# Altium PCB 风扇_V1.0.PcbDoc
Units mm, origin at the board's own origin, x right, y up, seen from the top; angles counter-clockwise.
Board outline 100 x 20 mm, 2 copper layers (Top Layer, Bottom Layer); 65 components, 44 nets, 189 pads, 136 vias.
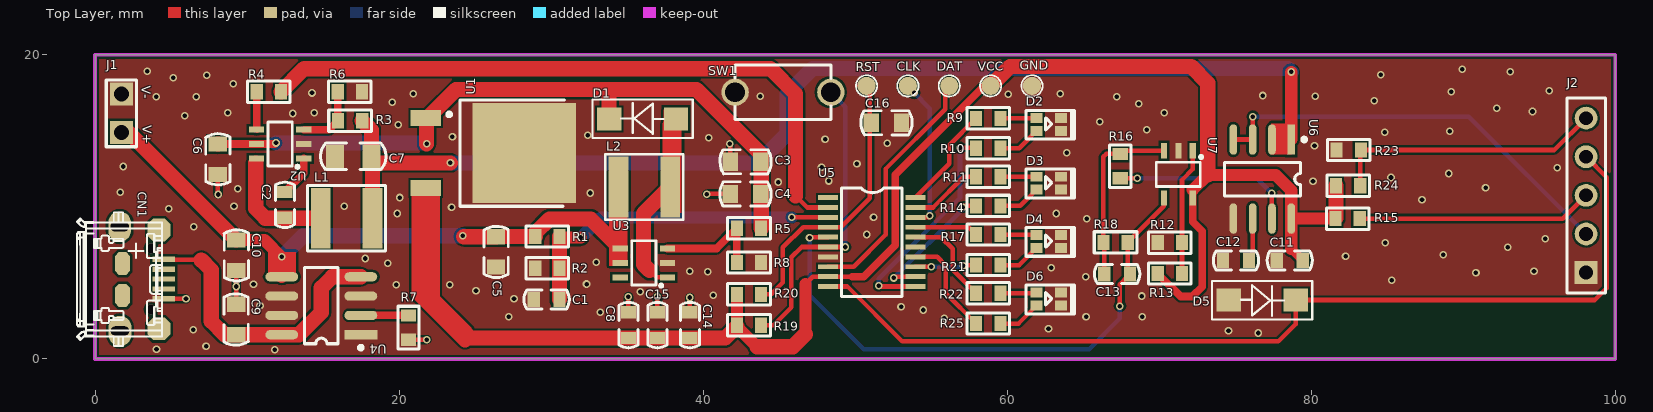
[diagram p0: Top Layer view]
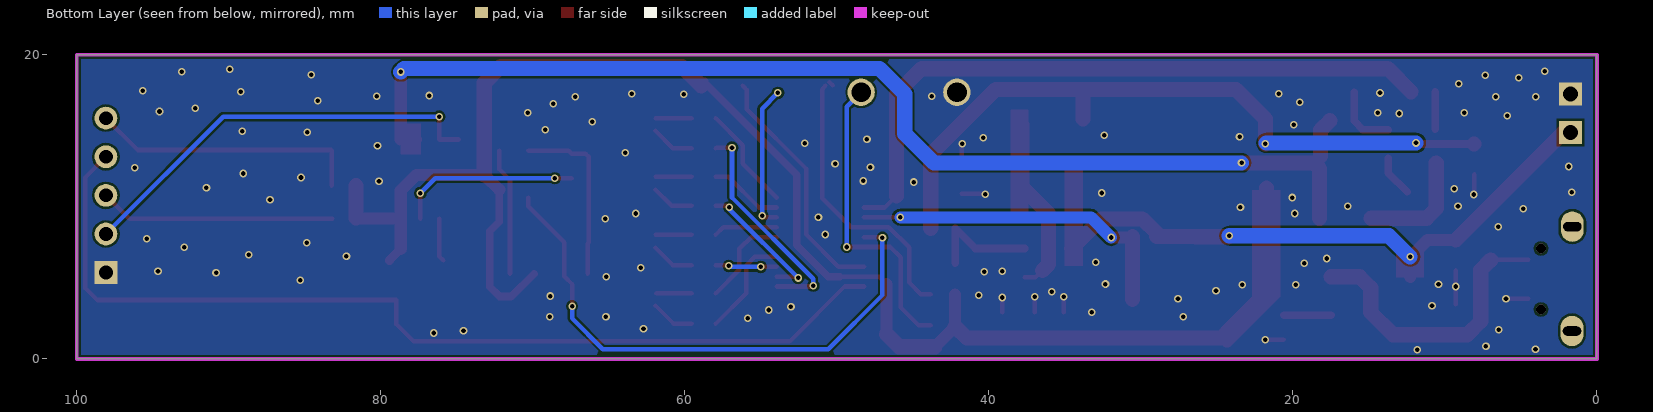
[diagram p1: Bottom Layer view, seen from below]

## Layer stack, top to bottom
Top Layer: signal copper 0.0356
Dielectric: dielectric 0.32, FR-4, Dk 4.8
Bottom Layer: signal copper 0.0356

## Board outline
0,0 100,0 100,20 0,20

## Design rules (kind name [scope] priority, off if disabled: settings)
Clearance [All] p1: gap=0.15
ComponentClearance [All] p1: gap=0.254 collisioncheckmode=3 verticalgap=0.254
PlaneConnect [All] p1: planeconnectstyle=Direct reliefexpansion=0.508 reliefentries=4 reliefconductorwidth=0.254 reliefairgap=0.254
PolygonConnect [All] p1: connectstyle=Direct reliefconductorwidth=0.254 reliefentries=4 polygonreliefangle="90 Angle"
RoutingVias [All] p1: holewidth=0.3 width=0.5 viastyle="Through Hole" minholewidth=0.3 minwidth=0.5 maxholewidth=0.711 maxwidth=1.27
SolderMaskExpansion [All] p1: expansion=0.102
TestPointUsage [All] p1: valid=0 allowmultiple=FALSE
Testpoint [(IsPad And (OnTopLayer Or OnBottomLayer))] p1: side=3 testpointundercomponent=TRUE minsize=1.016 maxsize=2.54 preferedsize=1.524 minholesize=0 maxholesize=1.016 preferedholesize=0.813 testpointgrid=0.025 style=297 order=0123456789
Width [All] p1: maxlimit=1 minlimit=0.15 preferedwidth=0.254
17 further rules are at their usual default settings.

## Components (designator, comment, footprint, x,y, rotation, side; value= is the part's Value field where it differs from the comment)
C1 "0.1UF" C-0603 29.707,3.9 r0 top
C2 "10nF" C-0603 12.482,10.13 r270 top
C3 "10uF" C-0805 42.789,12.959 r0 top
C4 "22uF" C-0805 42.789,10.846 r180 top
C5 "10uF" C-0805 26.375,7.033 r270 top
C6 "22uF" C-0805 8.077,13.128 r270 top
C7 "47uF" C-1206 16.985,13.315 r0 top
C8 "0.1uF" C-0603 35.085,2.217 r90 top
C9 "10uF" C-0805 9.282,2.584 r90 top
C10 "10uF" C-0805 9.289,6.811 r270 top
C11 "0.1uF" C-0603 78.59,6.477 r180 top
C12 "0.01uF" C-0603 75.05,6.478 r180 top
C13 "1nF" C-0603 67.236,5.585 r0 top
C14 "0.1uF" C-0603 39.125,2.217 r270 top
C15 "1uF" C-0603 36.995,2.217 r270 top
C16 "10uF" C-0805 52.057,15.524 r0 top
CLK "TP" TP-1.2 53.472,17.955 r90 top (schematic designator CLK1)
CN1 "Micro USB" USB-MICRO1 3.066,5.222 r0 top
D1 "1N5817" DIODE 36.017,15.781 r0 top
D2 "LED" 0603*2-LED 63.532,15.849 r180 top
D3 "LED" 0603*2-LED 63.532,11.978 r180 top
D4 "LED" 0603*2-LED 63.532,8.147 r180 top
D5 "5V" DIODE 76.778,3.87 r180 top
D6 "LED" 0603*2-LED 63.532,4.356 r180 top
DAT "TP" TP-1.2 56.194,17.955 r90 top (schematic designator DAT1)
GND "TP" TP-1.2 61.637,17.955 r90 top (schematic designator GND1)
J1 "HEADER 2" HED1X2 1.735,16.152 r90 top
J2 "MOTOR" HED1X5 98.085,5.674 r90 top
L1 "2.2uH" L-SMD 16.534,9.266 r180 top
L2 "4.7uH" L-SMD 36.124,11.318 r180 top
R1 "1M" R-0603 29.758,8.048 r0 top
R2 "1M" R-0603 29.757,5.958 r0 top
R3 "190k" R-0603 16.772,15.664 r0 top
R4 "1k" R-0603 11.438,17.568 r180 top
R5 "750K" R-0603 43.018,8.593 r0 top
R6 "10k" R-0603 16.761,17.568 r180 top
R7 "20k" R-0603 20.615,2.058 r90 top
R8 "30K" R-0603 43.018,6.334 r180 top
R9 "330" R-0603 58.753,15.818 r0 top
R10 "330" R-0603 58.753,13.858 r0 top
R11 "330" R-0603 58.753,11.973 r0 top
R12 "100k" R-0603 70.703,7.643 r0 top
R13 "100k" R-0603 70.703,5.608 r180 top
R14 "330" R-0603 58.753,10.06 r0 top
R15 "4.7k" R-0603 82.399,9.222 r0 top
R16 "1k" R-0603 67.436,12.676 r90 top
R17 "330" R-0603 58.753,8.176 r0 top
R18 "3.1k" R-0603 67.13,7.658 r0 top
R19 "47K" R-0603 43.018,2.206 r0 top
R20 "10K" R-0603 43.018,4.241 r0 top
R21 "330" R-0603 58.753,6.169 r0 top
R22 "330" R-0603 58.753,4.31 r0 top
R23 "NC/4.7k" R-0603 82.469,13.738 r0 top
R24 "4.7k/NC" R-0603 82.43,11.386 r180 top
R25 "330" R-0603 58.753,2.321 r0 top
RST "TP" TP-1.2 50.751,17.955 r90 top (schematic designator RST1)
SW1 "PUSH BOTTOM (B)" K-2P 42.103,17.536 r0 top
U1 "LM7805" D-PAK 24.994,13.538 r270 top
U2 "LP6406A" SOT-23-6L 12.172,14.132 r90 top
U3 "LP6218S" SOT-23-6L 36.098,6.309 r90 top
U4 "TP4056 SOP8" SOP8-150mil 14.884,3.492 r90 top
U5 "N76E003 TSSOP20" TSSOP-20 51.09,7.681 r270 top
U6 "ACS712ELCTR-05B-T" SOIC8 76.785,11.826 r180 top
U7 "LM321 SOT23-5" SOT-23-5 71.261,12.132 r180 top
VCC "TP" TP-1.2 58.916,17.955 r90 top (schematic designator VCC1)

## Footprints (in the part's own frame and the unit in brackets; to place one, negate y for a bottom-side part, rotate by r counter-clockwise, add the part's x,y. Pads: shape width x height; smd on the part's side, far side on the other; paste and mask are expansions set on the pad)
0603*2-LED [mm]
  rect 0.8x0.65 smd: 1(1.6,0.85) 2(1.6,0) 3(0,0) 4(0,0.85)
  silkscreen extent -0.9,-0.5 2.3,1.4
C-0603 [mm]
  rect 0.8x1 smd: 1(-0.85,0) 2(0.85,0)
  silkscreen extent -1.49,-0.63 1.49,0.63
C-0805 [mm]
  rect 1x1.2 smd: 1(-1,0) 2(1,0)
  silkscreen extent -1.68,-0.8 1.69,0.8
C-1206 [mm]
  rect 1.2x1.5 smd: 1(1.2,0) 2(-1.2,0)
  silkscreen extent -2.16,-0.88 2.16,0.88
D-PAK [mm]
  rect 1.05x2 smd: 1(-2.3,-3.25) 3(2.3,-3.25)
  rect 6.6x6.8 smd: 2(0,3.25)
  silkscreen extent -3.5,-1.82 3.5,5.9
DIODE [mm]
  rect 1.6x1.5 smd: 1(2.2,0) 2(-2.2,0)
  silkscreen extent -3.3,-1.25 3.3,1.28
HED1X2 [mm]
  rect 1.5x1.5 hole 1: 1(-1.27,0) 2(1.27,0)
  silkscreen extent -2.2,-1 2.2,1
HED1X5 [mm]
  rect 1.5x1.5 hole 0.9: 1(0,0)
  round 1.5 hole 0.9: 2(2.54,0) 3(5.08,0) 4(7.62,0) 5(10.16,0)
  silkscreen extent -1.33,-1.27 11.49,1.27
K-2P [mm]
  round 1.8 hole 1.3 mask+0.102: 1(0,0) 2(6.3,0)
  silkscreen extent 0,-1.8 6.3,1.8
L-SMD [mm]
  rect 1.3x4 smd: 1(1.692,0.016) 2(-1.708,0.016)
  silkscreen extent -2.57,-2.14 2.56,2.17
R-0603 [mm]
  rect 0.8x1 smd: 1(-0.8,0) 2(0.8,0)
  silkscreen extent -1.4,-0.7 1.4,0.7
SOIC8 [mm]
  rect 0.5x2 smd: 1(-1.905,-2.6)
  oval 0.5x2 smd: 2(-0.635,-2.6) 3(0.635,-2.6) 4(1.905,-2.6) 5(1.905,2.6) 6(0.635,2.6) 7(-0.635,2.6) 8(-1.905,2.6)
  silkscreen extent -2.88,-2.72 2.5,1.1
SOP8-150mil [mm]
  rect 0.6x2.159 smd: 1(-1.905,-2.6)
  oval 0.6x2.159 smd: 2(-0.635,-2.6) 3(0.635,-2.6) 4(1.905,-2.6) 5(1.905,2.6) 6(0.635,2.6) 7(-0.635,2.6) 8(-1.905,2.6)
  silkscreen extent -2.88,-2.72 2.5,1.1
SOT-23-5 [mm]
  rect 0.4x1 smd: 1(-0.95,-1.55) 2(0,-1.55) 3(0.95,-1.55) 4(0.95,1.55) 5(-0.95,1.55)
  silkscreen extent -1.6,-1.24 1.45,0.8
SOT-23-6L [mm]
  rect 0.4x1 smd: 1(-0.95,-1.55) 2(0,-1.55) 3(0.95,-1.55) 4(0.95,1.55) 5(0,1.55) 6(-0.95,1.55)
  silkscreen extent -1.6,-1.24 1.45,0.8
TP-1.2 [mm]
  round 1.2 smd: 1(0,0)
  silkscreen extent -0.7,-0.7 0.7,0.7
TSSOP-20 [mm]
  rect 0.32x1.3 smd: 1(-2.925,-2.875) 2(-2.275,-2.875) 3(-1.625,-2.875) 4(-0.975,-2.875) 5(-0.325,-2.875) 6(0.325,-2.875) 7(0.975,-2.875) 8(1.625,-2.875) 9(2.275,-2.875) 10(2.925,-2.875) 11(2.925,2.875) 12(2.275,2.875) 13(1.625,2.875) 14(0.975,2.875) 15(0.325,2.875) 16(-0.325,2.875) 17(-0.975,2.875) 18(-1.625,2.875) 19(-2.275,2.875) 20(-2.925,2.875)
  silkscreen extent -3.56,-2 3.58,2
USB-MICRO1 [mm]
  rect 1.5x0.35 smd: 1(1.448,1.325) 2(1.448,0.675) 3(1.448,0.025) 4(1.448,-0.625) 5(1.448,-1.275)
  oval 1.5x2 hole 0.6 slot 1.2 at 0 deg: ""(-1.448,3.474) ""(-1.428,-3.394)
  oct 1x1.5 smd: ""(-1.258,-1.05) ""(-1.258,1.05)
  oct 1.5x1.5 smd: ""(1.142,-3.25) ""(1.142,3.25)
  silkscreen extent -4.27,-4.38 1.35,4.42

## Free pads (board coordinates)
  round 0.65 hole 0.65: 0(3.68,3.25) 1(3.68,7.26)

## Via types
v1: diameter 0.5, hole 0.3, Top Layer to Bottom Layer, tented both sides, 136 vias

## Nets (pads, with @x,y where several pads share a name; then routed paths per layer and width w, separated by ;. In a path a pad name is that pad's centre, name@x,y a point inside that pad or via, vN(x,y) a via of type N, cw(c..) or ccw(c..) an arc to the next point about the centre after c; other vN are vias at no path point)
5V: C9.1 CN1.1 U4.4 U4.8 | length 19.5
  Top Layer w0.3: CN1.1@4.531,6.529 6.951,6.529 6.99,6.49
  Top Layer w1: 6.99,6.49 7.64,5.84 7.64,2.47 8.523,1.587 13.417,1.587 14.88,3.05 14.88,4.67 15.607,5.397 U4.4
B1: R9.1 U5.20 | length 6.9
  Top Layer w0.3: U5.20 56.19,12.831 56.19,14.055 R9.1
B2: R11.1 U5.19 | length 4.8
  Top Layer w0.3: U5.19 55.126,9.956 57.143,11.973 R11.1
B3: R17.1 U5.17 | length 4.2
  Top Layer w0.3: U5.17 57.473,8.656 R17.1
B4: R22.1 U5.16 | length 6.3
  Top Layer w0.3: U5.16 55.634,8.006 56.41,7.23 56.41,5.853 R22.1
BAT: C5.1 C10.1 J1.1 L2.1 R1.1 U3.4 U3.5 U4.5 | length 44.1
  Top Layer w0.8: C10.1 11.149,7.811 12.284,6.676 U4.5 ; 34.548,6.54 U3.4
  Top Layer w1: J1.1 2.218,14.882 C10.1 ; v1@24.247,8.033 C5.1 26.39,8.048 R1.1 28.958,8.267 29.889,9.198 32.61,9.198 U3.4 ; U3.4@34.432,7.376 L2.1
  Bottom Layer w1: v1(12.29,6.71) 13.67,8.09 v1(24.19,8.09)
DET_BAT: C1.2 R1.2 R2.2 U5.3 | length 22.3
  Top Layer w0.3: v1(45.824,9.306) U5.3
  Top Layer w0.8: R1.2@30.626,7.98 v1(31.96,7.98)
  Top Layer w1: C1.2@30.558,3.901 R1.2
  Bottom Layer w0.8: v1(31.96,7.98) 33.286,9.306 v1(45.824,9.306)
EN_12V: R4.1 U5.2 | length 44.3
  Top Layer w0.3: 46.08,10.72 46.844,9.956 U5.2
  Top Layer w1: R4.1 13.756,19.086 44.434,19.086 46.08,17.44 46.08,10.72
FG: J2.3 R15.2 | length 15.5
  Top Layer w0.3: R15.2 96.552,9.222 J2.3
GND: C1.1 C3.1 C4.2 C5.2 C6.2 C7.2 C8.2 C9.2 C10.2 C11.2 C12.2 C14.1 C15.1 C16.2 CN1.5 D2.3 D2.4 D3.3 D3.4 D4.3 D4.4 D5.1 D6.3 D6.4 GND.1 J1.2 J2.1 R2.1 R6.1 R7.1 R8.1 R12.1 R23.1 SW1.1 U1.2 U2.2 U3.2 U4.1 U4.3 U4.6 U4.7 U5.7 U6.5 U7.2 | length 11.9
  Top Layer w0.3: CN1.5 v1@5.973,3.947 ; v1@8.077,10.843 C6.2 ; C9.2 9.282,4.752 v1(9.289,4.759) C10.2 ; R7.1 v1(21.828,1.258) ; C8.2 v1(35.085,4.095) ; C15.1 v1(36.995,4.085) ; C14.1 v1(39.125,4.035) ; v1@40.256,10.846 C4.2 ; C3.1 v1@41.789,14.121
  other v1: 11.82,0.6 4.04,0.64 7.3,0.83 76.51,1.7 74.56,1.85 6.46,1.91 62.72,1.99 55.87,2.66 27.22,2.76 65.19,2.76 68.9,2.76 33.24,3.07 54.47,3.21 53.02,3.42 10.85,3.49 5.98,3.94 27.56,3.95 68.85,4.13 40.66,4.18 35.87,4.41 25.06,4.49 19.8,4.87 23.33,4.88 10.42,4.91 32.33,4.92 85.3,5.18 65.17,5.4 90.84,5.65 40.3,5.74 39.13,5.77 94.66,5.76 62.91,5.99 19.26,6.29 32.96,6.34 17.77,6.6 82.26,6.75 88.7,6.85 92.94,7.33 84.88,7.64 95.39,7.9 50.76,8.18 6.5,8.7 65.24,9.22 51.21,9.32 19.87,9.56 63.24,9.56 4.84,9.88 23.45,9.96 9.14,10.04 16.4,10.03 87.29,10.46 20.03,10.61 8.11,10.81 40.24,10.83 32.57,10.91 1.66,10.97 9.39,11.18 91.47,11.25 44.95,11.63 80.12,11.67 48.26,11.7 85.25,11.93 89.06,12.19 96.18,12.56 47.79,12.6 1.86,12.65 50.12,12.84 63.91,13.55 80.22,14.02 41.75,14.16 52.11,14.17 48.02,14.45 40.38,14.55 23.51,14.61 32.41,14.71 84.83,14.91 89.12,14.96 69.19,15.07 19.94,15.39 66.1,15.6 5.91,15.98 13,16.14 14.41,16.19 70.33,16.19 8.73,16.2 94.56,16.27 92.2,16.48 68.66,16.78 19.55,16.88 84.14,16.99 4.02,17.23 6.66,17.23 67.22,17.24 80.28,17.26 43.77,17.28 76.82,17.32 60.06,17.4 20.94,17.44 63.48,17.45 14.27,17.49 89.22,17.58 95.66,17.63 9.08,18.1 5.15,18.49 7.35,18.66 84.57,18.68 93.09,18.89 3.42,18.92 89.95,19.04
IP-: J2.2 U6.3 U6.4 | length 27.9
  Top Layer w0.3: U6.4 U6.3 76.15,15.95 v1(76.169,15.93)
  Bottom Layer w0.3: v1(76.169,15.93) 90.369,15.93 J2.2
KEY: R19.2 SW1.2 U5.6 | length 20.2
  Top Layer w0.3: R19.2 44.626,2.206 45.8,3.38 45.8,6.67 46.486,7.356 U5.6 v1(49.356,7.356)
  Bottom Layer w0.3: SW1.2 49.356,16.583 v1(49.356,7.356)
N23160559: R5.1 R8.2 U3.3 | length 7.4
  Top Layer w0.5: U3.3 40.885,7.259 R5.1 R8.2@42.218,6.288
N23160566: D1.1 L2.2 U3.1 | length 11.8
  Top Layer w0.3: 36.472,5.818 36.931,5.359 U3.1
  Top Layer w1: 36.472,5.818 36.08,6.21 36.08,9.55 L2.2 D1.1@37.832,15.396
N23367902: R4.2 U2.4 | length 2.5
  Top Layer w0.3: U2.4 U2.4@10.638,15.097
  Top Layer w0.5: U2.4@10.638,15.097 R4.2
N23367939: C2.2 L1.1 U2.6 | length 7.5
  Top Layer w1: 10.57,12.89 10.57,9.88 11.2,9.25 L1.1
N23367985: C2.1 U2.1 | length 2.7
  Top Layer w0.5: C2.1 13.722,12.22 U2.1
N23368069: R3.1 R6.2 U2.3 | length 4.4
  Top Layer w0.3: R6.2@15.972,17.525 15.966,17.53 R6.2@15.975,17.539
  Top Layer w0.5: U2.3 15.389,15.082 R3.1 R6.2@15.972,17.525
N23368260: R7.2 U4.2 | length 3.1
  Top Layer w0.152: R7.2@20.614,2.857 R7.2
  Top Layer w0.5: U4.2 R7.2@20.614,2.857
N23370161: D2.2 R9.2 | length 2.3
  Top Layer w0.3: R9.2 D2.2@61.901,15.818
N23370189: D3.2 R11.2 | length 2.4
  Top Layer w0.3: R11.2 D3.2@61.926,11.973
N23370207: D4.2 R17.2 | length 2.3
  Top Layer w0.3: R17.2 D4.2@61.903,8.176
N23370225: D6.2 R22.2 | length 2.3
  Top Layer w0.3: R22.2 D6.2@61.886,4.31
N23370257: D2.1 R10.2 | length 2.9
  Top Layer w0.3: R10.2 60.79,13.858 D2.1
N23370283: D3.1 R14.2 | length 2.8
  Top Layer w0.3: R14.2 60.864,10.06 D3.1
N23370301: D4.1 R21.2 | length 2.8
  Top Layer w0.3: R21.2 60.803,6.169 D4.1
N23370360: D6.1 R25.2 | length 2.9
  Top Layer w0.3: R25.2 60.747,2.321 D6.1
N23370702: J2.5 R23.2 R24.1 | length 18
  Top Layer w0.3: R24.1 R23.2@83.23,13.7 ; R23.2 95.989,13.738 J2.5
N23371476: C12.1 U6.6 | length 2.9
  Top Layer w0.3: C12.1 76.15,6.727 U6.6
N23373152: C13.1 R16.2 R18.1 U7.3 | length 11.9
  Top Layer w0.3: C13.1 66.386,7.601 R18.1 66.33,13.29 66.516,13.476 R16.2 67.642,13.682 U7.3
N23373354: R12.2 R13.1 U7.1 | length 8.4
  Top Layer w0.3: R13.1 R12.2 71.503,11.767 72.196,12.46 72.196,13.667 U7.1
P18: CLK.1 U5.18 | length 9.5
  Top Layer w0.3: v1(53.88,17.5) CLK.1@53.88,17.547 ; U5.18 54.866,9.306 v1@54.918,9.358
  Bottom Layer w0.3: v1(53.88,17.5) 54.918,16.462 v1(54.918,9.406)
PWM: D5.2 J2.4 U5.10 | length 64.3
  Top Layer w0.3: U5.10 49.494,4.756 53.107,1.143 77.833,1.143 78.978,2.288 D5.2 98.65,3.87 99.43,4.65 99.43,11.949 J2.4
R1: R10.1 U5.11 | length 14.8
  Top Layer w0.3: v1(51.55,4.81) 51.604,4.756 U5.11 ; v1(56.9,13.89) 57.921,13.89 R10.1
  Bottom Layer w0.3: v1(51.55,4.81) 51.55,5.26 56.9,10.61 v1(56.9,13.89)
R2: R14.1 U5.12 | length 8.9
  Top Layer w0.3: v1(52.55,5.32) 52.636,5.406 U5.12 ; v1(57.08,9.97) 57.17,10.06 R14.1
  Bottom Layer w0.3: v1(52.55,5.32) 57.08,9.85 v1(57.08,9.97)
R3: R21.1 U5.13 | length 4
  Top Layer w0.3: U5.13 55.004,6.056 v1(55.01,6.05) ; v1(57.11,6.11) 57.169,6.169 R21.1
  Bottom Layer w0.3: v1(55.01,6.05) 57.05,6.05 v1(57.11,6.11)
R4: R25.1 U5.14 | length 6.9
  Top Layer w0.3: U5.14 55.394,6.706 55.96,6.14 55.96,4.314 R25.1
TICEDAT: DAT.1 U5.8 | length 16.2
  Top Layer w0.3: U5.8 49.906,6.056 52,8.15 52,12.49 55.926,16.416 55.926,17.687 DAT.1
TICERST: C16.1 R20.2 RST.1 U5.4 | length 18.9
  Top Layer w0.3: R20.2 44.471,4.241 45.25,5.02 45.25,7.33 46.576,8.656 U5.4 49.056,8.656 50.972,10.572 50.972,17.734 RST.1 ; RST.1@50.282,17.988 RST.1@50.483,18.189
V_MOTOR: C13.2 R18.2 U5.5 U7.4 | length 37.4
  Top Layer w0.3: v1(47,7.97) 47.036,8.006 U5.5 ; v1(67.42,3.47) 67.42,4.919 67.93,5.429 R18.2 70.311,10.04 U7.4 70.311,10.071
  Bottom Layer w0.3: v1(47,7.97) 47,4.2 50.57,0.63 65.39,0.63 67.42,2.66 v1(67.42,3.47)
VDD_5V: C8.1 C11.1 C14.2 C15.2 R13.2 R15.1 R19.1 R20.1 R24.2 U1.3 U5.9 U6.8 U7.5 VCC.1 | length 116.6
  Top Layer w0.3: 46.73,4.93 47.206,5.406 49.82,5.406
  Top Layer w0.5: 49.82,5.406 50.576,5.406 52.64,7.47 52.64,12.1 58.495,17.955 VCC.1 ; VCC.1@58.708,18.168 VCC.1@58.708,18.25 ; R13.2 71.412,4.1 72.19,4.1 72.83,4.74 72.83,8.4 72.211,9.019 72.211,11.121 ; R15.1@81.595,9.226 R15.1@81.63,9.261
  Top Layer w0.6: 78.69,7.228 C11.1
  Top Layer w0.8: R20.1 42.218,2.128 43.546,0.8 ; 46.73,1.62 46.73,4.93 ; 72.211,11.121 73.19,12.1 77.67,12.1 78.69,11.08 78.69,7.228 ; U6.8 R15.1@81.595,9.226
  Top Layer w1: 21.36,4.24 24.34,1.26 ; U1.3 21.744,4.136 24.513,1.367 41.457,1.367 R19.1@42.218,2.128 ; 22.19,3.92 24.41,1.7 ; 43.546,0.8 45.91,0.8 46.73,1.62 ; VCC.1 60.184,19.223 72.117,19.223 73.19,18.15 73.19,12.1 ; R15.1@81.63,9.261 R24.2
VDD_12V: C7.1 L1.2 R3.2 U6.1 U6.2 | length 76.1
  Top Layer w0.8: 77.68,14.426 U6.1 v1(78.69,18.87)
  Top Layer w1: R3.2 18.185,15.051 C7.1 ; L1.2 18.242,12.52 18.611,12.889 v1(23.379,12.889)
  Bottom Layer w1: v1(23.379,12.889) 43.619,12.889 45.53,14.8 45.53,17.43 47.19,19.09 78.47,19.09 v1(78.69,18.87)
VDD_15_6V: C3.2 C4.1 C6.1 D1.2 R5.2 U1.1 U2.5 | length 46.8
  Top Layer w0.5: C6.1@8.081,14.132 11.832,14.132 v1(11.9,14.2)
  Top Layer w0.8: C3.2 C3.2@43.818,12.93
  Top Layer w1: C6.1 C6.1@8.081,14.132 ; v1(21.81,14.14) 21.81,15.772 23.748,17.71 39.57,17.71 43.818,13.462 R5.2 ; D1.2 33.817,17.687
  Bottom Layer w0.5: v1@21.75,14.2 v1(21.81,14.14)
  Bottom Layer w1: v1(11.9,14.2) v1@21.75,14.2
VIOUT: R16.1 U6.7 | length 12.1
  Top Layer w0.3: R16.1 67.44,11.88 v1(68.56,11.88) ; v1(77.4,10.9) 77.42,10.88 U6.7
  Bottom Layer w0.3: v1(68.56,11.88) 76.42,11.88 v1(77.4,10.9)
pads on no net: CN1. CN1.2 CN1.3 CN1.4 U3.6 U5.1 U5.15

## Polygon pours and split planes (outlines as drawn)
GND on Top Layer "Top Layer-GND" (solid, remove dead copper, pour order 1000): 0,20 100,20 100,0 0,0 0,20
GND on Bottom Layer "DGND" (solid, remove dead copper, pour order 1001): 0,20 100,20 100,0 0,0 0,20

## Keep-outs
Keep-Out Layer:
  the board outline again, w0.254

## Other copper
Top Layer:
  rectangle net BAT: 33.81,6.12 35.02,13.24
  rectangle net N23160566: 37.4,9.6 38.58,16.39
  rectangle net VDD_5V: 20.812,4.05 22.68,11.12
  rectangle net VDD_12V: 77.37,13.45 78.7,15.49
  rectangle net BAT: 11.37,5.35 13.21,7.04

## Silkscreen, mask and mechanical layers (free items; w line width, h text height)
Top Overlay:
  text "V-" at 3.08,17.95 h0.6 r270
  text "V+" at 3.12,15.38 h0.6 r270

## Dimensions
0,20 to 0,0 on Keep-Out Layer
0,20 to 100,20 on Keep-Out Layer